# Altium PCB TimeHAT.PcbDoc (part 2 of 3)
Units mil, origin at the board's own origin, x right, y up, seen from the top; angles counter-clockwise.
Board outline 2559.54 x 2225.8 mil, 4 copper layers (L01-TOP, L02-GND, L03-GND, L04-BOT), stack 17.5 mil thick; 36 components, 124 nets, 365 pads, 394 vias.
Unrouted connection lines stored in the file: 194.
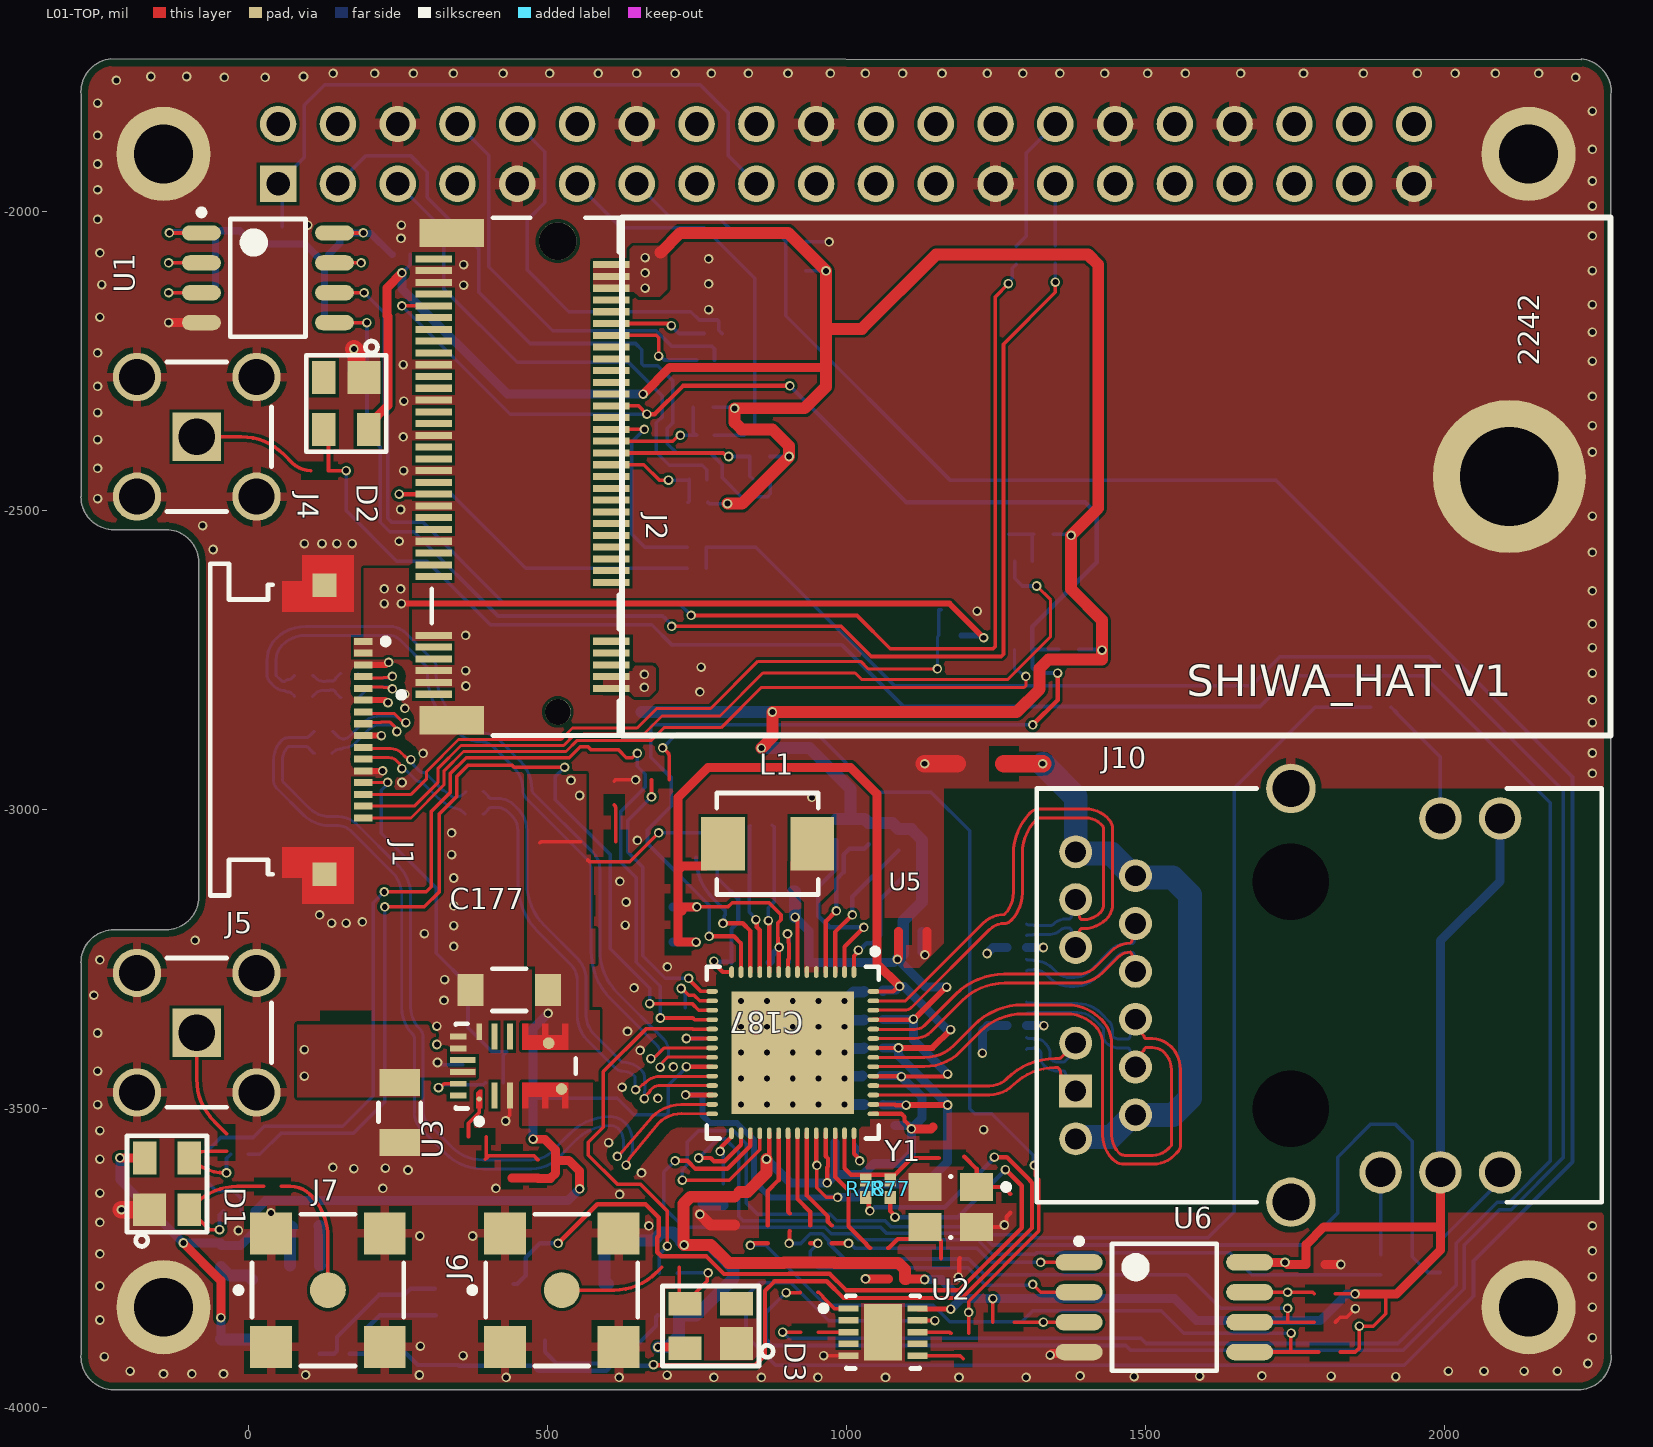
[diagram p0: L01-TOP view]

## Via types
v1: diameter 16, hole 10, L01-TOP to L04-BOT, tented both sides, 392 vias
v2: diameter 16, hole 10, L01-TOP to L04-BOT, 2 vias

## Nets (pads, with @x,y where several pads share a name; then routed paths per layer and width w, separated by ;. In a path a pad name is that pad's centre, name@x,y a point inside that pad or via, vN(x,y) a via of type N, cw(c..) or ccw(c..) an arc to the next point about the centre after c; other vN are vias at no path point) (continued)
I225_SPI_DIN: U6.2 | length 519.4
  L01-TOP w6: v1(1311.39,-3793.95) 1324.54,-3807.1 U6.2@1388.82,-3807.1
  L01-TOP w7.27: 938.98,-3725.04 939.21,-3725.27 951.89,-3725.27 v1(952.11,-3725.5)
  L04-BOT w6: v1(952.11,-3725.5) 939.22,-3738.39 939.22,-3753.12 952.28,-3766.19 1179.97,-3766.19 1180.21,-3765.94 1193.47,-3765.94 1193.72,-3766.19 1203.21,-3766.19 1232.09,-3795.07 1310.28,-3795.07 v1(1311.39,-3793.95)
I225_SPI_DOUT: U6.5 | length 1158.9
  L01-TOP w6: U6.5@1674.26,-3907.1 1743.25,-3907.1 ; v1(1743.6,-3875.53) 1743.25,-3875.88 1743.25,-3907.1 ; 1790.09,-3907.1 1743.25,-3907.1
  L01-TOP w7.27: v1(839.04,-3728.68) 841.41,-3728.68 845.04,-3725.04 867.87,-3725.04
  L04-BOT w6: v1(839.04,-3728.68) 864.82,-3728.68 965.22,-3829.07 1145.21,-3829.07 1172.77,-3856.63 1292.89,-3856.63 1311.7,-3837.82 1526.08,-3837.82 1563.79,-3875.53 v1(1743.6,-3875.53)
I225_ULP_WAKE_N: U5.4 | length 257.8
  L01-TOP w7.27: U5.4@965.05,-3271.46 965.05,-3186.76 v1(982.72,-3169.09)
  L04-BOT w7.27: v1(982.72,-3169.09) 982.72,-3116.59 994.99,-3104.32 994.99,-3075.24 1004.9,-3065.33 1029.35,-3065.33 1036.9,-3057.78
I225_WAKE_N: U5.12 | length 248.3
  L01-TOP w7.27: v1(793.28,-3189.99) 826.27,-3189.99 839.07,-3202.79 U5.12@839.07,-3271.46
  L04-BOT w6: 748.07,-3079.27 ccw(c846.69,-3079.27) 776.96,-3149 797.29,-3169.34 797.29,-3175.34 795.2,-3177.44 795.2,-3188.07 v1(793.28,-3189.99)
I225_XTAL_IN: R77.2 R78.2 U5.41 | length 232.4
  L01-TOP w7.27: U5.41@996.55,-3541.15 996.55,-3599.58 1007.45,-3610.48 1032.24,-3610.48 1080.91,-3610.48 1108.9,-3582.5 1154.4,-3582.5
I225_XTAL_OUT: U5.40 | length 217.1
  L01-TOP w7.27: U5.40@980.8,-3541.15 980.8,-3572.64 981.05,-3572.9 981.05,-3614.29 1003.24,-3636.48 1003.24,-3696.55 1032.66,-3725.97 1032.66,-3726.96 1038.87,-3733.17 1039.86,-3733.17
LED_LINK_ACT#: J10.17 | length 175.6
  L04-BOT w6: 1993.25,-3740.55 1993.25,-3721.08 2093.25,-3621.08 J10.17@2093.25,-3606.42
LED_SPEED_1000#: J10.13 | length 220.9
  L04-BOT w6: 1909.98,-2828.59 1910.97,-2828.59 1919.78,-2837.4 1919.78,-2838.38 1993.25,-2911.85 J10.13@1993.25,-3014.42
LED_SPEED_2500#: J10.15 | length 138.1
  L04-BOT w6: 1893.25,-3744.49 J10.15@1893.25,-3606.42
M2_GPS1_IRQ: J2.44 | length 196.1
  L01-TOP w6: J2.44@606.5,-2383.58 709.28,-2383.58 719.12,-2373.74 v1(721.83,-2373.74)
  L04-BOT w6: v1(721.83,-2373.74) 749.01,-2373.74 743.61,-2368.34 743.61,-2326.44
M2_GPS1_TP1:  | length 3925.8
  L01-TOP w6: v1(898.79,-3807.74) 922.06,-3807.74 922.7,-3807.1
  L04-BOT w6: 765.32,-2596.33 765.32,-2560.75 848.13,-2560.75 1080.32,-2792.94 1676.43,-2792.94 1725.55,-2743.82 1974.86,-2743.82 2198.95,-2967.9 2198.95,-3581.78 2111.54,-3669.19 2092.13,-3669.19 2033.23,-3728.1 2033.23,-3801.47 1930.92,-3903.78 1474.71,-3903.78 1467.09,-3896.17 875.76,-3896.17 865.88,-3886.29 865.88,-3840.02 898.16,-3807.74 v1(898.79,-3807.74)
M2_GPS1_TP2: J2.48
MDI_A_N: J10.3 U5.46 U12.4 | length 487.2
  L01-TOP w5: U5.46@1044.78,-3461.42 1045.15,-3461.8 1239.26,-3461.8 ccw(c1239.26,-3421.2) 1267.97,-3449.9 ; 1267.99,-3449.88 cw(c1348.89,-3530.78) 1348.89,-3416.37 1353.38,-3416.37 ccw(c1353.38,-3406.92) 1360.05,-3413.61 J10.3@1383.25,-3390.42
  L04-BOT w5: U12.4@1300.85,-3380.97 ccw(c1304.32,-3377.5) 1304.32,-3382.4 1310.85,-3382.4 cw(c1310.85,-3383.95) 1311.95,-3382.85 ccw(c1313.04,-3381.76) 1313.04,-3383.31 1318.58,-3383.31 cw(c1318.58,-3398.29) 1329.18,-3387.69 1333.67,-3392.19 cw(c1317.22,-3408.64) 1340.49,-3408.64 1340.49,-3416.68 ccw(c1353.55,-3403.62) 1353.55,-3422.09 1363.89,-3422.09 1374.54,-3411.45 ccw(c1353.51,-3390.42) J10.3@1383.25,-3390.42
MDI_A_P: J10.1 U5.45 U12.5 | length 498.9
  L01-TOP w5: U5.45@1044.78,-3477.17 1045.15,-3476.8 1239.3,-3476.8 ccw(c1239.3,-3421.27) 1278.56,-3460.53 ; 1278.58,-3460.51 cw(c1348.92,-3530.85) 1348.92,-3431.37 1353.38,-3431.37 1354.95,-3432.95 cw(c1347.13,-3440.77) 1358.19,-3440.77 ccw(c1369.26,-3440.77) 1361.43,-3448.59 J10.1@1383.25,-3470.42
  L04-BOT w5: U12.5@1300.85,-3400.65 cw(c1304.32,-3404.12) 1304.32,-3399.21 1310.85,-3399.21 ccw(c1310.85,-3397.67) 1311.95,-3398.76 cw(c1313.04,-3399.85) 1313.04,-3398.31 1318.57,-3398.31 1323.06,-3402.79 cw(c1317.2,-3408.65) 1325.49,-3408.65 1325.49,-3416.74 ccw(c1340.36,-3416.74) 1329.84,-3427.25 1329.95,-3427.36 ccw(c1353.46,-3403.85) 1353.46,-3437.09 1363.89,-3437.09 cw(c1356.82,-3444.17) 1366.82,-3444.17 ccw(c1390.53,-3444.17) 1373.77,-3460.93 J10.1@1383.25,-3470.42
MDI_B_N: J10.6 U5.49 U12.2 | length 1210.2
  L01-TOP w5: U5.49@1044.78,-3414.18 1045.15,-3414.55 1130.39,-3414.55 ccw(c1130.39,-3345.44) 1179.26,-3394.31 1213.61,-3359.96 cw(c1294.76,-3441.1) 1294.76,-3326.34 1367.76,-3326.34 cw(c1367.76,-3408.42) 1425.8,-3350.38 1425.88,-3350.46 cw(c1383.43,-3392.9) 1443.46,-3392.9 1443.46,-3544.56 ccw(c1485.23,-3544.56) 1455.69,-3574.1 ccw(c1465.06,-3564.73) 1465.06,-3577.98 1512.54,-3577.98 ccw(c1512.54,-3543.27) 1537.08,-3567.81 1543.35,-3561.55 1543.35,-3434.82 ccw(c1503.02,-3434.82) 1531.54,-3406.3 ccw(c1511.32,-3426.53) 1511.32,-3397.93 1500.35,-3397.93 1498.07,-3400.21 ccw(c1499.63,-3401.77) 1497.42,-3401.77 cw(c1495.21,-3401.77) 1496.78,-3403.33 1492.84,-3407.27 ccw(c1515.99,-3430.42) J10.6@1483.25,-3430.42
  L04-BOT w5: U12.2@1300.85,-3341.59 cw(c1304.32,-3345.06) 1304.32,-3340.16 1310.85,-3340.16 ccw(c1310.85,-3338.61) 1311.95,-3339.71 cw(c1313.04,-3340.8) 1313.04,-3339.25 1386.45,-3339.25 cw(c1386.45,-3379.42) 1414.85,-3351.02 1428.47,-3364.64 cw(c1426.3,-3366.82) 1429.37,-3366.82 1429.37,-3378.8 ccw(c1444.24,-3378.8) 1433.73,-3389.31 1433.8,-3389.39 ccw(c1456.12,-3367.07) 1456.12,-3398.63 1471.67,-3398.63 cw(c1464.6,-3405.71) 1474.6,-3405.71 1474.6,-3409.54 ccw(c1504.13,-3409.54) J10.6@1483.25,-3430.42